# EAGLE board XT-09_GoldStandard (EAGLE 9.5.1)
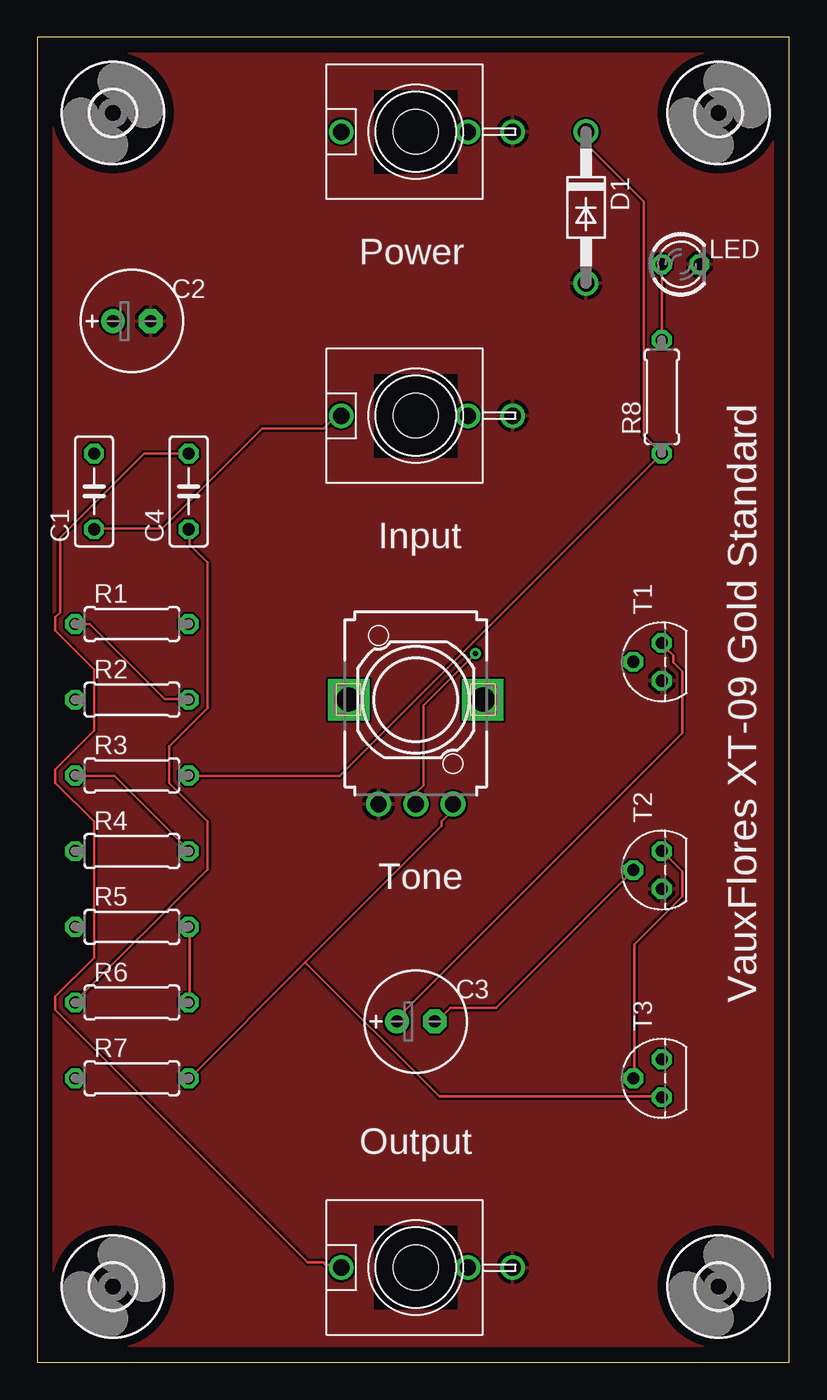
[diagram p0: board, top side]
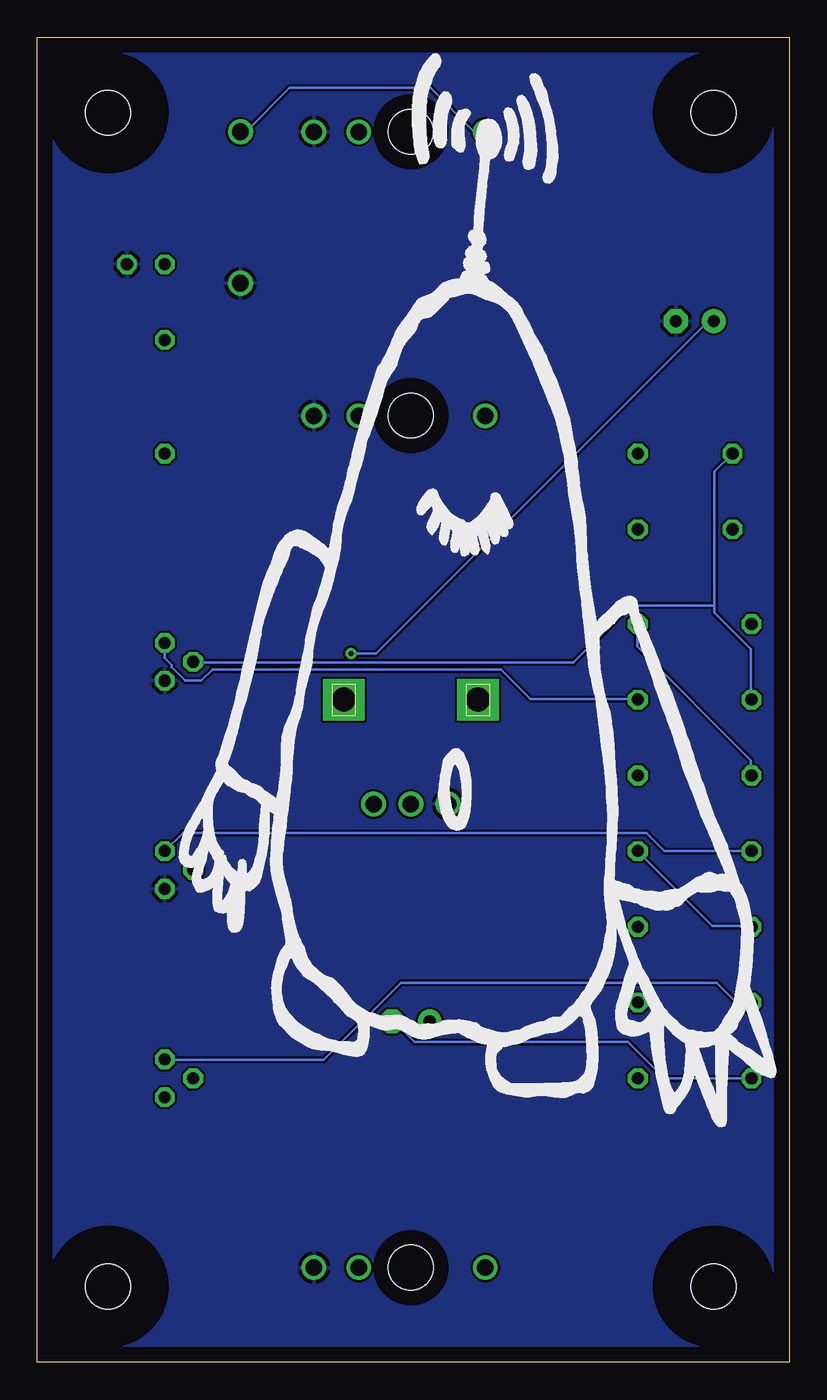
[diagram p1: board, bottom side, seen from below]

Size 50.47 x 88.89 mm. Coordinates in mm from the lower left corner, seen from the top.
Outline: 0,0 50.47,0 50.47,88.89 0,88.89 0,0
Copper layers (1*16): Top 0.035mm / dielectric 1.5mm / Bottom 0.035mm
Design rules "default": minimum track width 6mil, minimum drill 0.35mm, track to track 6mil, track to pad 6mil, pad to pad 6mil, via to via 6mil, smd to smd 6mil, copper to edge 40mil, drill to drill 6mil, minimum pad ring 10mil, minimum via ring 8mil, stop-mask expansion 4mil, vias tented up to drill 0mil, thermal gap 10mil
Holes 3 mm at 25.4,82.55 25.4,63.5 25.4,6.35

## Footprints (pad centres in the part's own frame; a part is rotated, then mirrored left to right if it is on the bottom)
C050-025X075 = drill 0.813 octagon: 1 -2.54,0; 2 2.54,0
E2,5-7 = drill 0.813 pad 1.6: + -1.27,0 | drill 0.813 pad 1.6 octagon: - 1.27,0
DO41-10 = drill 1.118: A 5.08,0; C -5.08,0
3,0 = hole 3: 0,0
LED3MM = drill 0.813 octagon: A -1.27,0; K 1.27,0
0207/7 = drill 0.813 octagon: 1 -3.81,0; 2 3.81,0
EVUFXL = drill 1.1 pad 1.676: 1 -2.5,-7; 2 0,-7; 3 2.5,-7 | drill 1.6 pad 2.8 square: M1 4.5,0; M2 -4.5,0
TO92 = drill 0.813 octagon: 1 1.27,0; 2 0,1.905; 3 -1.27,0
WQP-PJ301M-12_JACK = drill 1.1: P$1 0,5; P$2 0,-3.5; P$3 0,-6.5

## Placement (x,y rotation side)
C1  1uf  [C050-025X075]  3.81,58.42 90 top
C2  100 uf  [E2,5-7]  6.35,69.85 0 top
C3  100 uf  [E2,5-7]  25.4,22.86 0 top
C4  .01uf  [C050-025X075]  10.16,58.42 90 top
D1  1N4001  [DO41-10]  36.83,77.47 270 top
H1  MOUNT-HOLE3.0  [3,0]  5.08,5.08 0 top
H2  MOUNT-HOLE3.0  [3,0]  45.72,5.08 0 top
H3  MOUNT-HOLE3.0  [3,0]  5.08,83.82 0 top
H4  MOUNT-HOLE3.0  [3,0]  45.72,83.82 0 top
LED  [LED3MM]  43.18,73.66 0 top
R1  10k  [0207/7]  6.35,49.53 0 top
R2  2.2m  [0207/7]  6.35,44.45 0 top
R3  1k  [0207/7]  6.35,39.37 0 top
R4  100k  [0207/7]  6.35,34.29 0 top
R5  220r  [0207/7]  6.35,29.21 0 top
R6  10k  [0207/7]  6.35,24.13 0 top
R7  1M  [0207/7]  6.35,19.05 0 top
R8  4.7k  [0207/7]  41.91,64.77 90 top
R9  EVUF3L  [EVUFXL]  25.4,44.45 0 top
T1  2N5088  [TO92]  41.91,46.99 90 top
T2  2N5088  [TO92]  41.91,33.02 90 top
T3  2N5088  [TO92]  41.91,19.05 90 top
U$1  WQP-PJ301M-12_JACK  [WQP-PJ301M-12_JACK]  25.4,6.35 90 top
U$2  WQP-PJ301M-12_JACK  [WQP-PJ301M-12_JACK]  25.4,82.55 90 top
U$3  WQP-PJ301M-12_JACK  [WQP-PJ301M-12_JACK]  25.4,63.5 90 top

## Library data of the parts
C1-C4 = rcl; SPICEPREFIX: C
D1 = diode
H1-H4 = holes
LED = led
R1-R5 R8 = rcl
R6 R7 = rcl; SPICEPREFIX: R
R9 = pot
T1-T3 = transistor
U$1-U$3 = thonkiconn

## Nets
GND: C2.- D1.A LED.K R9.1 T1.3 T2.3 U$1.P$3 U$2.P$3 U$3.P$3
N$1: C1.2 R2.1 T1.2
N$2: C3.+ R1.1 R2.2 T1.1
N$3: R1.2 R3.1 R4.2 R5.1
N$4: C1.1 U$3.P$1
N$5: LED.A R8.2
N$6: C3.- R7.1 T2.2
N$7: R4.1 T2.1 T3.2
N$8: R5.2 R6.2
N$9: C4.1 R6.1 T3.1
N$10: C4.2 U$1.P$1
N$11: C2.+ R9.2
N$12: D1.C R3.2 R8.1 U$2.P$1
N$13: R7.2 R9.3 T3.3

## Tracks (layer width: path | path; a pad name or v marks a point on that pad's centre or on a via)
GND
  pour Top: 0,88.9 50.8,88.9 50.8,0 0,0
  pour Bottom: 0,88.9 50.8,88.9 50.8,0 0,0
N$1
  Bottom 0.152: 5.03,50.75 5.03,59.74 C1.2 | 5.03,50.75 5.03,50.29 2.59,47.85 2.59,44.5 R2.1 | 5.03,50.75 10.67,50.75 14.48,46.94 39.93,46.94 T1.2
N$2
  Top 0.152: R1.1 3.5,49.53 8.53,44.5 10.06,44.5 R2.2 | T1.1 41.91,48.16 42.67,47.4 42.67,46.94 43.28,46.33 43.28,42.22 24.23,23.16 24.23,22.86 C3.+
  Bottom 0.152: T1.1 41.91,47.24 41.45,46.79 41.45,46.63 40.54,45.72 39.47,45.72 38.71,46.48 19.36,46.48 17.37,44.5 10.21,44.5 R2.2
N$3
  Top 0.152: R3.1 2.59,39.32 5.18,39.32 10.21,34.29 R4.2
  Bottom 0.152: R5.1 2.59,29.26 5.18,29.26 10.21,34.29 R4.2 | R1.2 10.21,49.53 10.21,48.01 2.59,40.39 2.59,39.47 R3.1
N$4
  Top 0.152: C1.1 3.81,55.93 8.38,55.93 15.09,62.64 19.2,62.64 19.96,63.4 20.27,63.4 U$3.P$1
N$5
  Top 0.152: LED.A R8.2
N$6
  Top 0.152: C3.- 26.82,22.86 27.74,23.77 30.79,23.77 39.93,32.92 T2.2
  Bottom 0.152: R7.1 8.38,19.05 10.82,21.49 25.15,21.49 26.52,22.86 C3.-
N$7
  Top 0.152: T2.1 43.28,32.92 43.28,31.24 40.08,28.04 40.08,19.05 T3.2
  Bottom 0.152: R4.1 8.38,34.29 9.6,35.51 40.69,35.51 T2.1
N$8
  Top 0.152: R6.2 10.21,24.23 10.21,29.11 R5.2
N$9
  Top 0.152: R6.1 2.59,24.23 11.43,33.07 11.43,36.27 8.84,38.86 8.84,41.3 11.43,43.89 11.43,53.65 10.21,54.86 10.21,55.78 C4.1
  Bottom 0.152: T3.1 41.91,20.27 31.24,20.27 26.06,25.45 4.88,25.45 3.5,24.08 2.59,24.08 R6.1
N$10
  Top 0.152: C4.2 7.16,60.96 1.52,55.32 1.52,50.29 1.22,49.99 1.22,49.07 3.81,46.48 3.81,42.37 1.22,39.78 1.22,38.86 3.81,36.27 3.81,27.13 1.22,24.54 1.22,23.62 18.14,6.71 19.2,6.71 19.36,6.55 19.51,6.55 19.66,6.4 20.27,6.4 U$1.P$1
N$11  (via drill 0.35)
  Top 0.152: v29.41,47.55 25.91,44.04 25.91,38.71 25.45,38.25 25.45,37.49 R9.2
  Bottom 0.152: v29.41,47.55 27.74,47.55 5.49,69.8 5.18,69.8 C2.+
N$12
  Top 0.152: R3.2 10.21,39.32 20.27,39.32 R8.1 40.69,62.18 40.69,77.88 36.88,81.69 36.88,82.45 D1.C
  Bottom 0.152: U$2.P$1 20.42,82.6 21.18,82.6 24.08,85.5 33.53,85.5 36.42,82.6 36.73,82.6 D1.C
N$13
  Top 0.152: 17.98,26.82 27.13,35.97 27.13,36.27 27.89,37.03 27.89,37.34 R9.3 | 17.98,26.82 10.21,19.05 R7.2 | 17.98,26.82 26.98,17.83 41.91,17.83 T3.3

## Text on the board
tNames: Power | Input | Tone | VauxFlores XT-09 Gold Standard | Output